# Altium PCB Core.PcbDoc (part 3 of 4)
Units mil, origin at the board's own origin, x right, y up, seen from the top; angles counter-clockwise.
Board outline 3055.22 x 2665.85 mil, 4 copper layers (Top Layer, Layer 1, Layer 2, Bottom Layer), stack 61.583 mil thick; 290 components, 231 nets, 1079 pads, 581 vias.
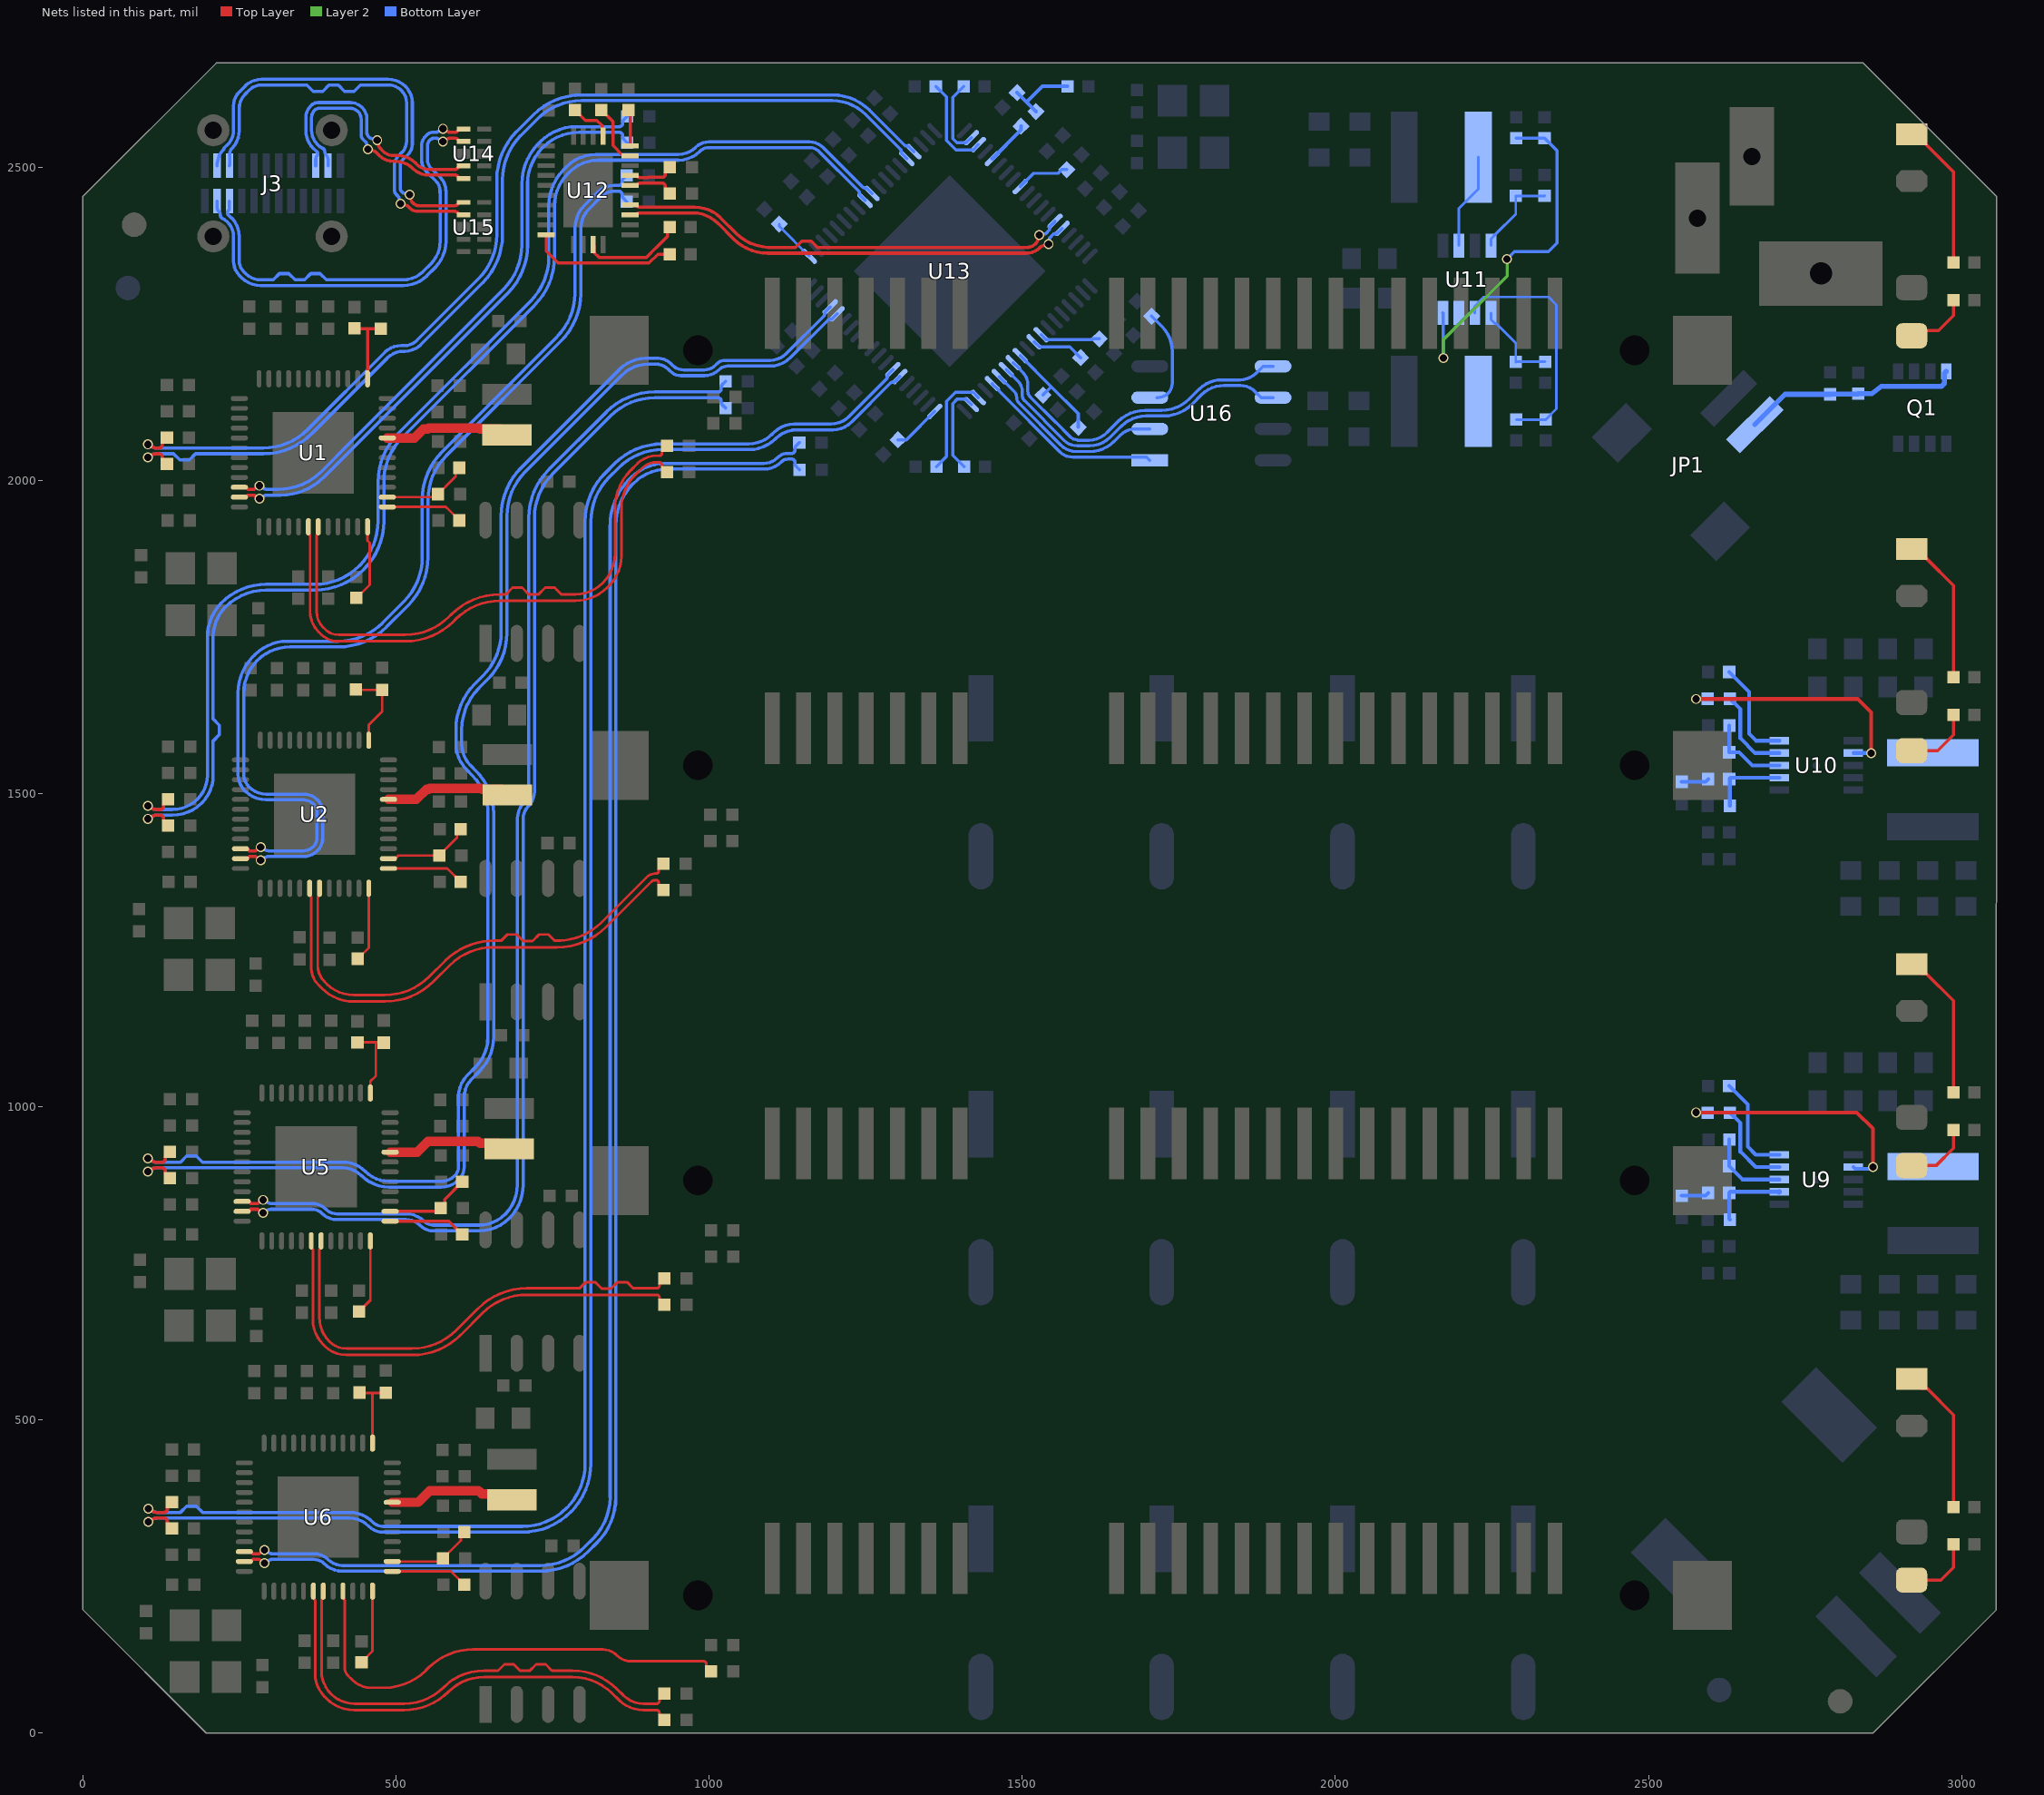
[diagram p5: the nets of this part, all layers, seen from the top]

## Via types
v1: diameter 15.75, hole 11.81, Top Layer to Bottom Layer, tented both sides, 581 vias

## Nets (pads, with @x,y where several pads share a name; then routed paths per layer and width w, separated by ;. In a path a pad name is that pad's centre, name@x,y a point inside that pad or via, vN(x,y) a via of type N, cw(c..) or ccw(c..) an arc to the next point about the centre after c; other vN are vias at no path point) (continued)
IN_SSRX2_N: J3.A10 U15.7 | length 692.7
  Top Layer w5.15: v1(507.33,2441.33) ccw(c511.62,2445.62) 511.62,2439.55 513.21,2439.55 cw(c513.21,2429.65) 520.2,2436.66 522.45,2434.41 ccw(c534.86,2446.82) 534.8,2429.27 ccw(c534.86,2446.82) 534.86,2429.27 593.06,2429.27 cw(c593.06,2421.11) U15.7@598.82,2426.88 ; U15.7@598.83,2426.87 cw(c597.31,2425.36) 599.45,2425.36 600.13,2424.68 ccw(c601.78,2426.33) 601.78,2424 U15.7@608,2424
  Bottom Layer w5.15: J3.A10@234.1,2502.34 ccw(c232.6,2503.85) 234.72,2503.85 234.72,2522.09 cw(c245.19,2522.09) 237.79,2529.49 237.85,2529.55 ccw(c208.93,2558.47) 248.03,2546.49 ccw(c208.93,2558.47) 249.83,2558.47 249.83,2594 cw(c280.93,2594) 258.94,2616 265.97,2623.03 cw(c285.21,2603.79) 285.21,2631 343,2631 358,2631 368,2621 383,2621 393,2631 408,2631 418,2621 433,2621 443,2631 487.27,2631 cw(c487.27,2600.27) 499.36,2628.52 cw(c487.27,2600.27) 509,2622 cw(c489.69,2602.69) 517,2602.69 517,2540.8 cw(c493.2,2540.8) 510.03,2523.97 504.18,2518.12 ccw(c520.23,2502.07) 497.53,2502.07 497.53,2463.09 ccw(c506.62,2463.09) 500.16,2456.7 ; 500.19,2456.67 502.93,2453.93 cw(c496.6,2447.6) 505.55,2447.6 505.55,2445.62 ccw(c511.62,2445.62) v1(507.33,2441.33)
IN_SSRX2_P: J3.A11 U15.6 | length 694.5
  Top Layer w5.15: v1(522,2456) cw(c517.7,2451.7) 523.78,2451.7 523.78,2450.12 ccw(c533.68,2450.12) 526.67,2443.13 ; 526.68,2443.12 527.58,2442.22 ccw(c536.76,2451.39) 536.71,2438.42 ccw(c536.76,2451.39) 536.76,2438.42 593.06,2438.42 ccw(c593.06,2446.57) 598.81,2440.79 ccw(c597.31,2442.32) 599.45,2442.32 600.13,2443 cw(c601.78,2441.36) 601.78,2443.69 U15.6@608,2443.69
  Bottom Layer w5.15: J3.A11@214.42,2502.34 214.42,2505.71 217.75,2519.45 223.05,2526.12 cw(c228.19,2522.03) 223.75,2526.87 ccw(c220.23,2530.63) 223.86,2526.98 224.6,2527.71 ccw(c220.96,2531.37) 225.03,2528.21 cw(c228.58,2528.21) 226.07,2530.72 231.32,2535.97 ccw(c208.73,2558.55) 239.64,2550.48 ccw(c208.73,2558.55) 240.68,2558.55 240.68,2597.79 cw(c271.78,2597.79) 249.79,2619.79 259.56,2629.56 cw(c285.13,2604) 259.61,2629.61 cw(c285.13,2604) 285.13,2640.15 487.32,2640.15 cw(c487.32,2600.39) 515.44,2628.5 515.51,2628.43 cw(c489.82,2602.74) 526.15,2602.74 526.15,2537.01 cw(c502.35,2537.01) 519.18,2520.18 510.7,2511.7 ccw(c520.39,2502) 506.68,2502 506.68,2466.96 ccw(c515.97,2466.96) 509.4,2460.4 ccw(c515.72,2466.72) 515.72,2457.78 517.7,2457.78 cw(c517.7,2451.7) v1(522,2456)
IN_SSTX1_N: J3.A3 U14.9 | length 414.5
  Top Layer w5.15: v1(470,2543) cw(c465.7,2538.7) 471.78,2538.7 471.78,2537.12 ccw(c481.68,2537.12) 474.67,2530.13 ; 474.68,2530.12 479.65,2525.15 ccw(c496,2541.51) 496,2518.38 502.79,2518.38 cw(c502.79,2478.26) 531.15,2506.64 533.84,2503.95 ccw(c552.02,2522.13) 552.02,2496.42 594.3,2496.42 ccw(c594.3,2501.57) 597.94,2497.93 599.45,2499.43 cw(c601.6,2499.43) 600.08,2500.95 cw(c601.85,2499.18) 601.85,2501.69 U14.9@608,2501.69
  Bottom Layer w5.15: 357.62,2547.73 cw(c397.18,2558.52) 357.59,2547.82 cw(c397.18,2558.52) 356.17,2558.52 356.17,2579.15 cw(c381.72,2579.15) 363.66,2597.21 365.07,2598.63 cw(c375.62,2588.09) 375.62,2603 426.78,2603 cw(c426.78,2575.92) 445.93,2595.07 446.07,2594.93 cw(c427.91,2576.78) 453.59,2576.78 453.59,2555.19 ccw(c463.19,2555.19) 456.39,2548.41 457.12,2547.68 ; 357.63,2547.68 ccw(c397.18,2558.52) 368.19,2529.52 ccw(c397.49,2558.64) 368.34,2529.37 ccw(c397.49,2558.64) 372.92,2525.43 cw(c369.88,2521.27) 375.03,2521.27 375.03,2519.45 374.53,2518.76 ccw(c380.89,2512.4) 371.9,2512.4 J3.A3@371.9,2502.34 ; 457.13,2547.67 ccw(c464.12,2554.68) 464.12,2544.78 465.7,2544.78 cw(c465.7,2538.7) v1(470,2543)
IN_SSTX1_P: J3.A2 U14.10 | length 402.5
  Top Layer w5.15: v1(455.33,2528.33) ccw(c459.62,2532.62) 459.62,2526.55 461.21,2526.55 cw(c461.21,2516.65) 468.2,2523.66 473.22,2518.64 ; 473.25,2518.61 ccw(c495.94,2541.36) 495.94,2509.23 499,2509.23 cw(c499,2469.11) 527.37,2497.48 527.41,2497.44 ccw(c551.97,2522.01) 551.97,2487.27 594.3,2487.27 cw(c594.3,2482.12) 597.94,2485.76 599.45,2484.25 ccw(c601.6,2484.25) 600.08,2482.73 ccw(c601.85,2484.5) 601.85,2482 U14.10@608,2482
  Bottom Layer w5.15: 366.4,2550.35 ccw(c397.34,2558.58) 366.47,2550.1 ccw(c397.34,2558.58) 374.69,2535.95 ccw(c397.49,2558.64) 374.79,2535.86 ccw(c397.49,2558.64) 382.39,2530.24 383.56,2529.62 cw(c381.17,2525.07) 386.31,2525.14 ; 366.39,2550.38 cw(c397.34,2558.58) 365.32,2558.58 365.32,2579.07 cw(c381.91,2579.07) 370.17,2590.79 ; 370.18,2590.8 cw(c377.55,2583.44) 377.55,2593.85 426.69,2593.85 cw(c426.69,2575.69) 439.53,2588.53 cw(c427.68,2576.68) 444.44,2576.68 444.44,2551.18 ccw(c453.52,2551.18) 447.07,2544.79 ; 386.31,2525.11 ccw(c395.3,2525.11) 388.94,2518.77 cw(c382.59,2512.4) 391.58,2512.4 J3.A2@391.58,2502.34 ; 447.1,2544.76 450.65,2541.21 cw(c443.65,2534.21) 453.55,2534.21 453.55,2532.62 ccw(c459.62,2532.62) v1(455.33,2528.33)
IN_SSTX2_N: J3.B2 U14.7 | length 737.3
  Top Layer w5.15: v1(575,2540.52) ccw(c575,2546.6) 576.22,2540.65 ccw(c575,2546.6) 579.3,2542.3 v1@580.42,2543.42 ; v1@580.42,2543.43 cw(c587.42,2536.42) 587.42,2546.32 593.06,2546.32 cw(c593.06,2538.17) U14.7@598.82,2543.93 ; U14.7@598.83,2543.93 cw(c597.31,2542.42) 599.45,2542.42 600.13,2541.74 ccw(c601.78,2543.38) 601.78,2541.06 U14.7@608,2541.06
  Bottom Layer w5.15: J3.B2@214.42,2445.66 214.42,2435.6 ccw(c223.41,2435.6) 217.05,2429.24 cw(c210.7,2422.89) 219.69,2422.89 ; 219.69,2422.86 ccw(c224.83,2422.91) 222.54,2418.3 cw(c208.51,2389.36) 240.68,2389.36 240.68,2365.83 240.68,2362 240.68,2349.92 ccw(c273.35,2349.92) 250.22,2326.84 ; 250.24,2326.82 253.58,2323.48 ccw(c284.08,2353.98) 253.65,2323.41 ccw(c284.08,2353.98) 283.98,2310.85 ccw(c284.08,2353.98) 284.08,2310.85 511.72,2310.85 ccw(c511.72,2364.14) 549.4,2326.46 562.3,2339.36 ccw(c519.95,2381.71) 579.84,2381.71 579.84,2462.62 579.53,2462.93 ccw(c551.16,2462.93) 571.22,2482.99 556.26,2497.95 cw(c571.01,2512.69) 550.15,2512.69 550.15,2533.71 cw(c563.29,2533.71) 553.99,2542.99 cw(c562,2535.02) 562,2546.32 562.58,2546.32 cw(c562.58,2536.42) v1@569.58,2543.43 ; v1@569.58,2543.42 570.7,2542.3 ccw(c575,2546.6) v1(575,2540.52)
IN_SSTX2_P: J3.B3 U14.6 | length 737.1
  Top Layer w5.15: v1(575,2561.27) cw(c575,2555.2) 579.3,2559.49 580.42,2558.37 ccw(c587.42,2565.37) 587.42,2555.47 593.06,2555.47 ccw(c593.06,2563.63) 598.81,2557.85 ccw(c597.31,2559.38) 599.45,2559.38 600.13,2560.06 cw(c601.78,2558.42) 601.78,2560.74 U14.6@608,2560.74
  Bottom Layer w5.15: J3.B3@234.1,2445.66 234.1,2435.6 cw(c225.11,2435.6) 231.47,2429.24 230.97,2428.55 230.97,2426.73 ccw(c236.12,2426.73) 233.03,2422.61 cw(c208.51,2389.36) 249.83,2389.36 249.83,2365.83 ; 249.83,2365.79 249.83,2350 ccw(c273.55,2350) 256.76,2333.24 260,2330 ccw(c284.14,2354.14) 260.48,2329.53 ccw(c284.14,2354.14) 284.14,2320 289,2320 304,2320 314,2330 329,2330 339,2320 354,2320 364,2330 379,2330 389,2320 421,2320 511.62,2320 ccw(c511.62,2364.38) 543,2333 555.78,2345.78 ccw(c519.78,2381.77) 570.69,2381.77 570.69,2458.83 570.38,2459.14 570.38,2462.83 ccw(c550.91,2462.83) 564.69,2476.58 549.1,2492.17 cw(c568.64,2511.72) 541,2511.72 541,2533.74 cw(c563.21,2533.74) 541,2533.81 cw(c563.21,2533.74) 547.47,2549.41 ; 547.5,2549.45 548.88,2550.82 cw(c560.11,2539.6) 560.11,2555.47 562.58,2555.47 ccw(c562.58,2565.37) 569.58,2558.37 570.7,2559.49 cw(c575,2555.2) v1(575,2561.27)
LXO-A: L1.1 U1.44 | length 198.3
  Top Layer w15: U1.44@486.11,2067.62 529.62,2067.62 543.75,2081.75 550.8,2081.75 552.39,2083.34 632.66,2083.34 634.25,2081.75 666.25,2081.75 L1.1@674,2074
LXO-B: L2.1 U2.44 | length 201.3
  Top Layer w15: U2.44@488.11,1490.62 532.62,1490.62 548.75,1506.75 552.09,1506.75 553.68,1508.34 636.66,1508.34 638.25,1506.75 669.82,1506.75 L2.1@678,1498.58
LXO-C: L3.1 U5.44 | length 191.7
  Top Layer w15: U5.44@490.65,927.62 533.62,927.62 551,945 630.81,945 634.06,941.75 664.25,941.75 L3.1@671,935
LXO-D: L4.1 U6.44 | length 212.2
  Top Layer w15: U6.44@494.11,368.62 535.62,368.62 554,387 631.98,387 637.23,381.75 674.25,381.75 L4.1@690,366
NetC17_2: C17.2 R1.2 U1.38 | length 139.1
  Top Layer w4: U1.38@486.11,1973.13 562.13,1973.13 595.5,2006.5 595.5,2014.18 R1.2@601.32,2020
NetC18_2: C18.2 R2.2 U2.38 | length 139.1
  Top Layer w4: U2.38@488.11,1396.13 499,1396.13 503.87,1401 C18.2@569,1401 597.5,1429.5 597.5,1437.18 R2.2@603.32,1443
NetC23_1: C23.1 R5.2 U1.1 | length 122.6
  Top Layer w5.15: R5.2@434,2242.86 434.86,2242 455.43,2242 ; U1.1@454.61,2162.11 454.61,2241.18 455.43,2242 ; C23.1@476,2242 455.43,2242
NetC24_1: C24.1 R6.2 U2.1 | length 131.3
  Top Layer w4: R6.2@436,1665.86 436.58,1665.28 C24.1@478,1665.28 478,1631 456.63,1609.63 U2.1@456.61,1585.11
NetC59_2: C59.2 R9.2 U5.38 | length 139.1
  Top Layer w5: U5.38@490.65,833.13 566.68,833.13 577.85,844.31 577.85,851.99 R9.2@605.86,880
NetC60_2: C60.2 R10.2 U6.38 | length 139.1
  Top Layer w4: U6.38@494.11,274.13 570.13,274.13 603.5,307.5 603.5,315.18 R10.2@609.32,321
NetC65_1: C65.1 R13.2 U5.1 | length 126.7
  Top Layer w4: R13.2@438.54,1102.86 468,1102.86 ; U5.1@459.16,1022.11 459.16,1040.52 468,1049.37 468,1102.86 ; C65.1@480.54,1102.28 479.97,1102.86 468,1102.86
NetC66_1: C66.1 R14.2 U6.1 | length 122.7
  Top Layer w4: R14.2@442,543.86 442.58,543.28 463.29,543.28 ; U6.1@462.61,463.11 462.61,542.61 463.29,543.28 ; C66.1@484,543.28 463.29,543.28
NetC101_1: C101.1 L5.1 U9.2 | length 406.9
  Top Layer w6: v1(2576,991) 2832.51,991 2858.4,965.11 v1(2858.4,903.77)
  Bottom Layer w6: v1(2576,991) 2594.11,991 C101.1@2594.47,990.64 ; U9.2@2827.05,903.68 2829.96,900.78 2830.05,900.87 2852.86,900.87 2855.76,903.77 v1(2858.4,903.77)
NetC101_2: C101.2 U9.9 | length 141.9
  Bottom Layer w6: C101.2@2629.9,990.64 2646.62,973.92 2646.62,928.18 2671.12,903.68 U9.9@2708.95,903.68
NetC110_2: C110.2 R19.1 U9.7 | length 124.8
  Bottom Layer w6: C110.2@2629.9,819.78 2628.79,820.89 R19.1@2628.79,862.5 2630.61,864.32 2707.13,864.32 U9.7@2708.04,863.41
  Bottom Layer w8: U9.7@2708.04,863.41 U9.7@2708.95,864.32
NetC111_2: C111.2 R19.2 | length 44.1
  Bottom Layer w6: C111.2@2553.06,858.07 2590.9,858.07 R19.2@2595.33,862.5
NetC112_1: C112.1 L6.1 U10.2 | length 400.1
  Top Layer w6: v1(2576,1651) 2834,1651 2855.4,1629.6 v1(2855.4,1564.62)
  Bottom Layer w6: v1(2576,1651) 2594.12,1651 C112.1@2594.41,1651.29 ; U10.2@2827.08,1564.65 v1@2855.37,1564.65
NetC112_2: C112.2 U10.9 | length 142.1
  Bottom Layer w6: C112.2@2629.84,1651.29 2646.63,1634.5 2646.63,1588.18 2670.12,1564.68 U10.9@2708.95,1564.68
NetC121_2: C121.2 R25.1 U10.7 | length 123.4
  Bottom Layer w6: C121.2@2629.84,1480.43 2629.84,1524.25 2630.9,1525.32 U10.7@2708.95,1525.32
NetC122_2: C122.2 R25.2 | length 44.1
  Bottom Layer w6: C122.2@2553,1518.72 2590.84,1518.72 R25.2@2595.27,1523.14
NetC130_2: C130.2 JP1.1 Q1.1 R18.2 | length 349.6
  Bottom Layer w8: JP1.1@2669.63,2088.87 2718.04,2137.28 C130.2@2790,2137.28 2790.49,2137.78 2834.51,2137.78 R18.2@2835,2138.27 2840.84,2138.27 2856.84,2138.27 2871.72,2150 2967.66,2150 2972.34,2154.69 2972.34,2170.83 Q1.1@2975.39,2173.87
NetC131_1: C131.1 R40.1 U13.68 | length 171.9
  Bottom Layer w5.15: U13.68@1496.78,2199.01 1546.4,2149.4 ; R40.1@1533,2136 1546.4,2149.4 ; C131.1@1589.47,2084.47 1589.47,2106.32 1546.4,2149.4
NetL7_2: L7.2 U11.6 | length 154
  Bottom Layer w4.29: U11.6@2197.2,2374.75 2197.2,2434.02 2228,2464.82 L7.2@2228,2516
NetL8_2: L8.2 U11.3
NetLED1_1: LED1.1 R56.2 | length 236.7
  Top Layer w5.15: LED1.1@2920,2552.4 2927.5,2552.4 2942.42,2537.48 2942.42,2536.62 2986.77,2492.27 R56.2@2986.77,2347.8
NetLED2_1: LED2.1 R57.2 | length 94.4
  Top Layer w5.15: LED2.1@2929.02,2234.69 2933.39,2239.07 2963.07,2239.07 2986.77,2262.77 R57.2@2986.77,2287.82
NetLED3_1: LED3.1 R58.2 | length 237.5
  Top Layer w5.15: LED3.1@2920,1890.07 2934.92,1875.15 2943.85,1875.15 2986.77,1832.23 R58.2@2986.77,1685.5
NetLED4_1: LED4.1 R59.2 | length 109.1
  Top Layer w5.15: LED4.1@2920,1568.39 2961.39,1568.39 2986.77,1593.77 R59.2@2986.77,1625.62
NetLED5_1: LED5.1 R60.2 | length 237.2
  Top Layer w5.15: LED5.1@2920,1227.75 2934.92,1212.83 2943.17,1212.83 2986.77,1169.23 R60.2@2986.77,1023
NetLED6_1: LED6.1 R61.2 | length 107.6
  Top Layer w5.15: LED6.1@2920,906.06 2959.06,906.06 2986.77,933.77 R61.2@2986.77,963.12
NetLED7_1: LED7.1 R62.2 | length 237.7
  Top Layer w5.15: LED7.1@2920,565.43 2934.92,550.5 2944.5,550.5 2986.77,508.23 R62.2@2986.77,361
NetLED8_1: LED8.1 R63.2 | length 112
  Top Layer w5.15: LED8.1@2920,244.53 2966.53,244.53 2986.77,264.77 R63.2@2986.77,301.62
NetR3_2: R3.2 U1.37 | length 124
  Top Layer w4: U1.37@486.23,1957.5 579.82,1957.5 581.02,1956.3 R3.2@601.32,1936
NetR4_2: R4.2 U2.37 | length 124.1
  Top Layer w4: U2.37@488.11,1380.39 581.94,1380.39 R4.2@603.32,1359
NetR7_2: R7.2 U1.36 | length 123.7
  Top Layer w4: R7.2@437,1812.27 458,1833.27 458,1900.23 454.61,1903.61 U1.36@454.61,1925.89
NetR8_2: R8.2 U2.36 | length 119.9
  Top Layer w4: R8.2@439,1236.27 456.61,1253.88 U2.36@456.61,1348.89
NetR11_2: R11.2 U5.37 | length 124.1
  Top Layer w5: U5.37@490.65,817.39 584.48,817.39 R11.2@605.86,796
NetR12_2: R12.2 U6.37 | length 124.1
  Top Layer w4: U6.37@494.11,258.39 587.94,258.39 R12.2@609.32,237
NetR15_2: R15.2 U5.36 | length 120.1
  Top Layer w4.29: R15.2@441.09,673.27 459.16,691.34 U5.36@459.16,785.89
NetR16_2: R16.2 U6.36 | length 120.9
  Top Layer w4: R16.2@445,113.27 462.61,130.88 U6.36@462.61,226.89
NetR17_2: R17.2 R21.1 U9.8 | length 131.8
  Bottom Layer w6: R17.2@2629.05,947.93 2629.05,905.46 R21.1@2628.79,905.21 2650.01,884 U9.8@2708.95,884
NetR22_1: R22.1 U9.10 | length 165.3
  Bottom Layer w6: R22.1@2628.79,1033.35 2658.31,1003.84 2658.31,936.24 2671.19,923.37 U9.10@2708.95,923.37
NetR24_2: R24.2 R27.1 U10.8 | length 131.7
  Bottom Layer w6: R24.2@2628.99,1608.57 2628.99,1566.11 R27.1@2628.73,1565.86 2644.8,1565.86 2665.66,1544.99 U10.8@2708.95,1544.99
NetR28_1: R28.1 U10.10 | length 164.6
  Bottom Layer w6: R28.1@2628.73,1694 2660.61,1662.12 2660.61,1595.53 2671.78,1584.37 U10.10@2708.95,1584.37
NetR30_2: R30.2 R32.1 U11.4 | length 584
  Layer 2 w5: v1(2172.43,2195) 2172.43,2224.43 2274,2326 v1(2274,2353)
  Bottom Layer w5: U11.4@2171.61,2267.25 2172.43,2266.43 v1(2172.43,2195) ; v1(2274,2353) 2286,2365 2340,2365 2354,2379 2354,2526.27 R30.2@2334,2546.27 R32.1@2289,2546.27
NetR31_2: R31.2 R33.1 U11.2 | length 389.4
  Bottom Layer w4.29: U11.2@2222.8,2267.25 2222.8,2278 2233.74,2288.95 2233.74,2289.05 2237.34,2292.64 2340.36,2292.64 2353,2280 2353,2114 R31.2@2336,2097 R33.1@2289,2097
NetR34_2: R34.2 R36.1 U11.8 | length 141.8
  Bottom Layer w4.29: U11.8@2248.39,2374.75 2248.39,2385.5 2254.74,2391.86 2254.86,2391.86 2288,2425 R34.2@2288,2454 2333.73,2454 R36.1@2334,2454.27
NetR35_2: R35.2 R37.1 U11.1 | length 143
  Bottom Layer w4.29: U11.1@2248.39,2267.25 2248.39,2256.5 2254.74,2250.14 2256.86,2250.14 2288,2219 R35.2@2288,2189 2288.25,2189.25 R37.1@2335,2189.25
NetR38_2: R38.2 U12.24 | length 58.3
  Top Layer w5: R38.2@871,2591 873.93,2588.07 U12.24@873.93,2533.87
NetR39_2: R39.2 U12.23 | length 98.4
  Top Layer w5: R39.2@828,2591 846.4,2572.6 846.4,2534.49 861.33,2519.56 872.49,2519.56 U12.23@873.93,2518.12
NetR41_1: R41.1 U13.66 | length 84.7
  Bottom Layer w5.15: U13.66@1518.99,2221.22 1527.35,2212.85 1576.15,2212.85 R41.1@1593.17,2195.83
NetR42_1: R42.1 U13.65 | length 96.7
  Bottom Layer w5.15: U13.65@1530.16,2232.39 1537.99,2224.56 1611.28,2224.56 1612.72,2226 R42.1@1623,2226
NetR43_1: R43.1 U13.75 | length 144.2
  Bottom Layer w5: R43.1@1407,2022 1388.9,2040.1 1388.9,2122.59 1395.68,2129.37 1410.44,2129.37 U13.75@1418.79,2121.02
NetR44_1: R44.1 U13.74 | length 171.1
  Bottom Layer w5: R44.1@1363,2022 1379.1,2038.1 1379.1,2126.1 1393.54,2140.54
  Bottom Layer w5.15: 1393.54,2140.54 1421.61,2140.54 U13.74@1429.96,2132.19
NetR45_1: R45.1 U12.25 | length 70.7
  Top Layer w5: R45.1@786,2591.27 802.66,2574.61 820.76,2574.61 829.18,2566.19 829.18,2551.06 U12.25@830.62,2549.62
NetR46_2: R46.2 U12.13 | length 163.6
  Top Layer w5: U12.13@814.88,2376.38 816.32,2374.94 816.32,2363.68 824,2356 900,2356 915,2371
  Top Layer w5.15: 915,2371 933.45,2389.45 933.45,2400.18 R46.2@937.27,2404
NetR47_1: R47.1 U13.1 | length 77.2
  Bottom Layer w5: R47.1@1301.83,2064.83 1315.23,2064.83 U13.1@1360.31,2109.92
NetR48_2: R48.2 U12.10 | length 237
  Top Layer w5: U12.10@740.07,2392.13 740.07,2365.93 759,2347 904.11,2347 918.11,2361 R48.2@937.27,2361
NetR49_1: R49.1 U13.47 | length 85.6
  Bottom Layer w5: U13.47@1496.78,2468.99 1517.8,2490 1556.95,2490 1563.12,2496.17 R49.1@1571.17,2496.17
NetR50_1: R50.1 R51.2 R53.1 | length 118.3
  Bottom Layer w6: R50.1@1491.83,2618.83 1506.83,2603.83 ; R51.2@1521.83,2588.83 1506.83,2603.83 ; R53.1@1572.27,2629 1532,2629 1506.83,2603.83
NetR51_1: R51.1 U13.43 | length 70.7
  Bottom Layer w6: U13.43@1452.24,2513.53 1498.17,2559.47 R51.1@1498.17,2565.17
NetR52_1: R52.1 U13.41 | length 154.1
  Bottom Layer w5: R52.1@1362,2629 1379.1,2611.9 1379.1,2542.48 1394.12,2527.46 1421.61,2527.46 U13.41@1429.96,2535.81
NetR54_1: R54.1 U13.40 | length 126.9
  Bottom Layer w5: R54.1@1406.27,2629 1388.9,2611.63 1388.9,2545.41 1395.68,2538.63 1410.44,2538.63 U13.40@1418.79,2546.98
NetR55_1: R55.1 U13.20 | length 71.2
  Bottom Layer w4: R55.1@1112,2409 1112,2405.61 U13.20@1159.92,2357.69
NetR64_1: R64.1 U16.3 | length 156.1
  Bottom Layer w5: R64.1@1706.61,2262.01 1723.1,2245.51 ; U16.3@1714.79,2132 1716.38,2132 ccw(c1716.38,2155.22) 1732.78,2138.78 ccw(c1716.38,2155.22) 1739.6,2155.22 1739.6,2205.68 ccw(c1683.27,2205.68) 1723.13,2245.49
RX1_N: C5.2 U6.31 | length 760.9
  Top Layer w4.29: U6.31@383.87,226.89 383.87,218.01 cw(c379.22,218.01) 382.51,214.71 ccw(c385.8,211.42) 381.14,211.42 381.14,99.57 ccw(c433.57,99.57) 396.47,62.53 ; 396.53,62.47 ccw(c433.57,99.57) 433.57,47.15 512.77,47.15 ccw(c512.77,137.37) 576.57,73.57 cw(c640.37,9.77) 640.37,100 641.73,100 663.14,100 673.14,110 688.14,110 698.57,99.57 713.57,99.57 724,110 739,110 749,100 764,100 782.02,100 cw(c782.02,-0.27) 852.92,70.63 863.18,60.37 ccw(c895.11,92.3) 895.11,47.14 916.3,47.15 ccw(c916.3,51.44) 919.33,48.4 ccw(c916.3,51.44) 920.59,51.44 cw(c929.92,51.44) 923.32,58.03 C5.2@928.28,63
RX1_P: C7.2 U6.30 | length 760.6
  Top Layer w4.29: U6.30@368.13,226.89 368.13,218.01 ccw(c372.78,218.01) 369.48,214.72 cw(c366.2,211.42) 370.86,211.42 370.86,95.31 ccw(c423.28,95.31) 386.18,58.27 389.27,55.17 ccw(c433.5,99.4) 389.37,55.08 ccw(c433.5,99.4) 433.39,36.86 ccw(c433.5,99.4) 433.5,36.85 512.91,36.85 ccw(c512.91,137.03) 583.75,66.2 cw(c640.52,9.43) 640.52,89.71 781.92,89.71 cw(c781.92,-0.52) 845.68,63.32 855.93,53.07 ccw(c895.07,92.2) 856.02,52.98 ccw(c895.07,92.2) 894.97,36.86 ccw(c895.07,92.2) 895.07,36.85 916.3,36.85 cw(c916.3,32.56) 919.33,35.6 cw(c916.3,32.56) 920.59,32.56 ccw(c929.92,32.56) 923.32,25.97 C7.2@928.28,21
RX2_N: C6.2 U5.31 | length 760.5
  Top Layer w4.29: U5.31@380.42,785.89 380.42,775.08 377.69,772.35 377.69,664.11 ccw(c432.72,664.11) 393.78,625.22 ; 393.83,625.17 ccw(c420.83,652.22) 420.83,614 525.58,614 ccw(c525.58,714) 596.29,643.29 630.87,677.87 cw(c708.79,599.95) 630.97,677.97 cw(c708.79,599.95) 708.79,710.14 770,710.14 793.14,710.14 803.14,720.14 818.14,720.14 828.57,709.72 843.57,709.72 854,720.14 869,720.14 879,710.14 894,710.14 916.3,710.14 ccw(c916.3,714.44) 919.33,711.4 ccw(c916.3,714.44) 920.59,714.44 920.59,715.48 cw(c927.4,715.48) 922.58,720.29 C6.2@928.28,726
RX2_P: C8.2 U5.30 | length 760.2
  Top Layer w4.29: U5.30@364.67,785.89 364.67,775.08 367.4,772.35 367.4,660 ccw(c422.81,660) 383.63,620.82 386.58,617.87 ccw(c420.76,652.05) 386.66,617.79 ccw(c420.76,652.05) 420.66,603.71 ccw(c420.76,652.05) 420.76,603.71 525.62,603.71 ccw(c525.62,713.89) 603.53,635.98 638.12,670.57 cw(c708.83,599.86) 708.83,699.86 916.3,699.86 cw(c916.3,695.56) 919.33,698.6 cw(c916.3,695.56) 920.59,695.56 920.59,694.52 ccw(c927.4,694.52) 922.58,689.71 C8.2@928.28,684
RX3_N: C13.2 U2.31 | length 792.7
  Top Layer w4.29: U2.31@377.87,1348.89 377.87,1340.01 cw(c373.22,1340.01) 376.51,1336.71 ccw(c379.8,1333.42) 375.14,1333.42 375.14,1277.33 375.14,1225.44 ccw(c411.44,1225.44) 385.78,1199.78 389.28,1196.28 ccw(c432.7,1239.7) 432.7,1178.29 482.32,1178.29 ccw(c482.32,1278.29) 553.03,1207.58 578.17,1232.72 cw(c656.09,1154.8) 578.27,1232.82 cw(c656.09,1154.8) 638.9,1263.65 cw(c656.09,1154.8) 656.09,1265 667.77,1265 677.77,1275 692.77,1275 703.2,1264.57 718.2,1264.57 728.63,1275 743.63,1275 753.63,1265 757.5,1265 ccw(c757.5,1365) 768.61,1265.62 ccw(c757.5,1365) 828.21,1294.29 900.48,1366.57 cw(c913.95,1353.1) 905.43,1370.13 cw(c913.95,1353.1) 913.95,1372.14 915.3,1372.14 ccw(c915.3,1376.44) 918.33,1373.4 ccw(c915.3,1376.44) 919.59,1376.44 919.59,1377.48 cw(c926.4,1377.48) 921.58,1382.29 C13.2@927.28,1388
RX3_P: C15.2 U2.30 | length 792.4
  Top Layer w4.29: U2.30@362.13,1348.89 362.13,1340.01 ccw(c366.78,1340.01) 363.49,1336.71 cw(c360.2,1333.42) 364.86,1333.42 364.86,1281.59 364.85,1221.18 ccw(c401.15,1221.18) 375.49,1195.51 382.05,1188.95 ccw(c432.63,1239.53) 382.09,1188.91 ccw(c432.63,1239.53) 432.63,1168 482.36,1168 ccw(c482.36,1278.18) 560.27,1200.27 585.42,1225.42 cw(c656.13,1154.71) 656.13,1254.71 757.54,1254.71 ccw(c757.54,1364.89) 835.45,1286.98 907.73,1359.26 cw(c914,1352.98) 914,1361.86 915.3,1361.86 cw(c915.3,1357.56) 918.33,1360.6 cw(c915.3,1357.56) 919.59,1357.56 919.59,1356.52 ccw(c926.4,1356.52) 921.58,1351.71 C15.2@927.28,1346
RX4_N: C14.2 U1.31 | length 921.2
  Top Layer w4.29: U1.31@375.87,1925.89 375.87,1917.01 cw(c371.22,1917.01) 374.51,1913.71 ccw(c377.8,1910.42) 373.14,1910.42 373.14,1859.83 373.14,1791.24 373.15,1791.07 ccw(c412.76,1791.24) 373.16,1790.03 ccw(c410.19,1791.2) 383.96,1765.04 386.97,1762.03 ccw(c408.01,1782.98) 397.37,1755.26 ccw(c408.78,1787.32) 408.79,1753.29 514.75,1753.29 ccw(c514.75,1852.25) 535.7,1755.53 ccw(c514.75,1852.25) 584.72,1782.28 588.17,1785.72 cw(c666.09,1707.8) 666.09,1818 675.64,1818 686.26,1828.63 701.26,1828.63 712.32,1817.57 727.32,1817.57 738.37,1828.63 753.37,1828.63 764,1818 779,1818 786.54,1818 ccw(c786.54,1879.47) 829.98,1835.98 ccw(c782.56,1883.44) 849.65,1883.44 849.65,1954.9 cw(c935.93,1954.9) 874.92,2015.9 885.59,2026.57 cw(c915.95,1996.22) 885.65,2026.63 cw(c915.95,1996.22) 915.95,2039.14 920.58,2039.14 ccw(c920.58,2043.44) 923.61,2040.4 ccw(c920.58,2043.44) 924.87,2043.44 924.87,2044.48 cw(c931.68,2044.48) 926.86,2049.29 C14.2@932.57,2055
RX4_P: C16.2 U1.30 | length 919.9
  Top Layer w4.29: U1.30@360.13,1925.89 360.13,1917.01 ccw(c364.78,1917.01) 361.49,1913.71 cw(c358.2,1910.42) 362.86,1910.42 362.86,1864.09 362.85,1791.2 ccw(c410.19,1791.2) 376.67,1757.78 ccw(c410.19,1791.2) 376.72,1757.73 379.74,1754.71 ccw(c408.01,1782.98) 408.01,1743 514.8,1743 ccw(c514.8,1852.12) 591.96,1774.96 595.42,1778.42 cw(c666.13,1707.71) 666.13,1807.71 786.58,1807.71 ccw(c786.58,1879.37) 837.25,1828.7 840.29,1831.74 ccw(c792.85,1879.18) 859.94,1879.18 859.94,1954.77 cw(c936.23,1954.77) 882.29,2008.71 892.83,2019.26 cw(c916,1996.09) 916,2028.85 920.58,2028.86 cw(c920.58,2024.56) 923.61,2027.6 cw(c920.58,2024.56) 924.87,2024.56 924.87,2023.52 ccw(c931.68,2023.52) 926.86,2018.71 C16.2@932.57,2013
SPICLK: U13.70 U16.6 | length 522.6
  Bottom Layer w5: U13.70@1474.51,2176.74 1493.6,2157.64 cw(c1478.16,2142.2) 1500,2142.2 1500,2136.42 ccw(c1513.96,2136.42) 1504.09,2126.55 1566.82,2063.82 ccw(c1587.99,2084.99) 1587.99,2055.05 1607.42,2055.05 ccw(c1607.42,2101.97) 1640.6,2068.8 1657.75,2085.94 cw(c1698,2045.69) 1698,2102.62 1725.17,2102.62 ccw(c1725.17,2168.22) 1771.55,2121.82 ; 1771.56,2121.83 1786.35,2136.62 cw(c1822.06,2100.91) 1822.06,2151.41 1848.29,2151.41 cw(c1848.29,2118.27) 1871.7,2141.73 ; 1871.72,2141.71 1881.42,2132 U16.6@1900.43,2132
SPICS: U13.72 U16.1 | length 301.6
  Bottom Layer w5: U13.72@1452.24,2154.47 1452.24,2153.69 1462.02,2143.9 1462.02,2143.16 1559.09,2046.09 ccw(c1580.92,2067.92) 1580.92,2037.05 1698.52,2037.05 U16.1@1703.57,2032
SPISI: U13.69 U16.5 | length 517.5
  Bottom Layer w5: U13.69@1485.61,2187.84 1493.96,2179.49 1500.11,2173.34 cw(c1478.65,2151.88) 1509,2151.94 cw(c1478.65,2151.88) 1509,2151.88 1509,2141.95 ccw(c1521.22,2141.95) 1511.66,2134.35 ccw(c1521.22,2141.95) 1512.58,2133.31 1553.97,2091.92 1554.08,2091.92 1576,2070 ccw(c1590.36,2084.36) 1576.04,2069.96 ccw(c1590.36,2084.36) 1587.76,2064.22 1588.64,2064.11 ccw(c1589.47,2070.55) 1589.47,2064.05 1606.3,2064.05 ccw(c1606.3,2104.68) 1635.03,2075.95 1652.86,2093.78 cw(c1695.91,2050.73) 1695.91,2111.62 1722.26,2111.62 ccw(c1722.26,2175.24) 1767.22,2130.22 ; 1767.25,2130.25 1782.33,2145.33 cw(c1818.74,2108.92) 1818.74,2160.41 1847.5,2160.41 ccw(c1847.5,2197.26) 1873.53,2171.18 1884.35,2182 U16.5@1900.43,2182
SPISO: U13.71 U16.2 | length 304.7
  Bottom Layer w5: U13.71@1463.34,2165.57 1487.11,2141.79 cw(c1477.73,2132.41) 1491,2132.41 ccw(c1504.27,2132.41) 1494.88,2123.04 1561.96,2055.96 ; 1561.98,2055.94 ccw(c1585.87,2079.87) 1585.87,2046.05 1608.23,2046.05 ccw(c1608.23,2100.03) 1646.38,2061.85 1656.47,2071.93 ; 1656.48,2071.95 cw(c1680.77,2047.62) 1680.77,2082 U16.2@1703.57,2082
SSRX1_N: C94.1 U13.7 | length 2929.4
  Top Layer w5.15: v1@103.7,358.37 v1(104.8,358.37) cw(c104.8,352.3) 109.1,356.59 v1@110.22,355.47 ; v1@110.23,355.47 ccw(c117.22,362.47) 117.22,352.57 129.87,352.57 ccw(c129.87,357.73) 133.5,354.07 ; 133.51,354.08 ccw(c129.87,357.73) 135.02,357.73 135.02,358.66 cw(c142.43,358.66) 137.18,363.89 C94.1@142.28,369
  Bottom Layer w5.15: v1(104.8,358.37) cw(c104.8,352.3) 109.1,356.59 ccw(c118.8,366.3) 118.8,352.58 141,352.57 156,352.57 166,362.57 181,362.57 191,352.57 252.51,352.57 425.29,352.57 cw(c425.29,299.29) 462.94,337 ; 462.97,336.97 ccw(c479.43,353.43) 479.43,330.15 701.73,330.15 ccw(c701.73,430.15) 772.44,359.44 772.71,359.71 ccw(c702,430.42) 802,430.42 802,1934.27 cw(c911.07,1934.27) 802,1934.42 cw(c911.07,1934.27) 833.85,2011.29 cw(c911.07,1934.27) 833.94,2011.39 848.96,2026.4 cw(c925.6,1949.76) 925.6,2058.15 1063.44,2058.15 ccw(c1063.44,2110.56) 1100.5,2073.5 1103.18,2076.18 cw(c1136,2043.36) 1136,2089.77 1194.64,2089.77 ccw(c1194.64,2129.81) 1222.95,2101.5 1282.96,2161.5 ccw(c1278.94,2165.52) 1284.62,2165.48 cw(c1290.29,2165.52) U13.7@1286.27,2169.52 ; U13.7@1286.28,2169.53 U13.7@1293.49,2176.74
SSRX1_P: C96.1 U13.6 | length 2932.4
  Top Layer w5.15: v1@104.8,342.93 v1(104.8,337.63) ccw(c104.8,343.7) 109.1,339.41 v1@110.22,340.53 ; v1@110.23,340.53 cw(c117.22,333.53) 117.22,343.43 129.87,343.43 cw(c129.87,338.27) 133.5,341.93 ; 133.51,341.92 cw(c129.87,338.27) 135.02,338.27 135.02,337.34 ccw(c142.43,337.34) 137.18,332.11 C96.1@142.28,327
  Bottom Layer w5.15: v1(104.8,337.63) ccw(c104.8,343.7) 109.1,339.41 cw(c118.8,329.7) 118.8,343.42 425.24,343.43 cw(c425.24,299.17) 456.53,330.46 ccw(c479.38,353.31) 479.38,321 701.77,321 ccw(c701.77,430.05) 778.88,352.94 779.26,353.32 ccw(c702.08,430.39) 811.15,430.39 811.15,1934.23 cw(c911.15,1934.23) 840.44,2004.94 855.21,2019.71 cw(c925.92,1949) 925.92,2049 1063.55,2049 ccw(c1063.55,2110.29) 1106.89,2066.95 1106.97,2067.03 ; 1106.99,2067.05 cw(c1139.79,2034.21) 1139.79,2080.62 1197.79,2080.62 ccw(c1197.79,2122.21) 1227.2,2092.8 1289.42,2155.03 ; 1289.43,2155.03 cw(c1293.44,2151.02) 1293.44,2156.69 ccw(c1293.44,2162.37) 1297.43,2158.34 U13.6@1304.66,2165.57
SSRX2_N: C93.1 U13.16 | length 2356.6
  Top Layer w5.15: v1(104,917.37) cw(c104,911.3) 108.3,915.59 109.42,914.47 ccw(c116.42,921.47) 116.42,911.58 126.41,911.58 ccw(c126.41,916.73) 130.04,913.07 ; 130.05,913.08 ccw(c126.41,916.73) 131.56,916.73 131.56,917.66 cw(c138.97,917.66) C93.1@133.72,922.89 ; C93.1@133.73,922.9 C93.1@138.83,928
  Bottom Layer w5.15: v1(104,917.37) cw(c104,911.3) 108.3,915.59 109.42,914.47 ccw(c116.42,921.47) 116.42,911.58 141,911.58 156,911.58 166,921.58 181,921.58 191,911.58 221,911.58 415.1,911.58 ; 415.1,911.57 cw(c415.1,860.23) 451.4,896.53 451.47,896.47 ccw(c488.82,933.82) 488.82,881 572.27,881 ccw(c572.27,911.73) 593.98,889.98 ccw(c579.88,904.12) 599.85,904.12 599.85,1015.92 cw(c648.54,1015.92) 599.85,1016.01 cw(c648.54,1015.92) 614.06,1050.3 cw(c648.54,1015.92) 614.11,1050.35 626.92,1063.15 ccw(c578.31,1111.69) 647,1111.69 647,1467.94 ccw(c559.94,1467.94) 621.54,1529.46 ccw(c559.94,1467.94) 621.5,1529.5 612.64,1538.36 cw(c653.18,1578.9) 595.85,1578.9 595.85,1602.25 cw(c698.55,1602.25) 625.93,1674.87 638.72,1687.66 ccw(c568.01,1758.37) 668.01,1758.37 668.01,1942.95 cw(c777.07,1942.95) 668.01,1943.1 cw(c777.07,1942.95) 699.85,2019.98 cw(c777.07,1942.95) 699.95,2020.07 857.12,2177.24 cw(c898.97,2135.39) 898.97,2194.58 919,2194.58 cw(c919,2167) 938.49,2186.51 941.32,2183.68 ; 941.34,2183.66 ccw(c959.5,2201.86) 959.5,2176.15 992.37,2176.15 ccw(c992.37,2200.63) 1009.68,2183.32 1012.36,2186 ; 1012.38,2186.02 cw(c1025.44,2172.92) 1025.44,2191.42 1096.91,2191.42 ccw(c1096.91,2229.01) 1123.49,2202.43 1182.76,2261.7 ccw(c1178.74,2265.71) 1184.42,2265.71 cw(c1190.1,2265.71) U13.16@1186.07,2269.72 ; U13.16@1186.08,2269.73 U13.16@1193.29,2276.94
SSRX2_P: C95.1 U13.15 | length 2354.9
  Top Layer w5.15: v1(104,896.63) ccw(c104,902.7) 108.3,898.41 109.42,899.53 cw(c116.42,892.53) 116.42,902.42 126.41,902.42 cw(c126.41,897.27) 130.04,900.93 ; 130.05,900.92 cw(c126.41,897.27) 131.56,897.27 131.56,896.34 ccw(c138.97,896.34) C95.1@133.72,891.11 ; C95.1@133.73,891.1 C95.1@138.83,886
  Bottom Layer w5.15: v1(104,896.63) ccw(c104,902.7) 108.3,898.41 109.42,899.53 cw(c116.42,892.53) 116.42,902.42 414.94,902.42 cw(c414.94,859.85) 445,890 cw(c414.94,859.85) 445.04,889.96 ccw(c488.76,933.67) 488.76,871.85 572.37,871.85 ccw(c572.37,911.49) 600.4,883.46 600.49,883.55 ; 600.53,883.59 ccw(c579.96,904.09) 609,904.09 609,1015.88 cw(c648.63,1015.88) 620.61,1043.9 633.43,1056.73 ccw(c578.4,1111.65) 656.15,1111.65 656.15,1468.04 ccw(c560.19,1468.04) 628.08,1535.86 ccw(c560.19,1468.04) 628.04,1535.9 619.18,1544.76 cw(c653.41,1578.99) 619.14,1544.8 cw(c653.41,1578.99) 605,1578.99 605,1602.11 cw(c698.89,1602.11) 632.5,1668.5 646.68,1682.68 ccw(c573.1,1756.26) 677.16,1756.26 677.16,1942.92 cw(c777.16,1942.92) 706.45,2013.63 860.91,2168.09 cw(c902.76,2126.24) 902.76,2185.43 915.21,2185.43 cw(c915.21,2157.85) 934.7,2177.36 937.53,2174.53 ; 937.55,2174.51 ccw(c955.71,2192.71) 955.71,2167 992.45,2167 ccw(c992.45,2200.43) 1016.09,2176.79 1016.15,2176.85 cw(c1029.23,2163.77) 1029.23,2182.27 1096.95,2182.27 ccw(c1096.95,2228.92) 1129.93,2195.93 1189.23,2255.23 cw(c1193.24,2251.22) 1193.24,2256.89 ccw(c1193.24,2262.57) 1197.25,2258.55 U13.15@1204.47,2265.76
SSRX3_N: C52.1 U13.29 | length 1976.2
  Top Layer w5.15: v1(104,1480.37) cw(c104,1474.3) 108.3,1478.59 109.42,1477.47 ccw(c116.42,1484.47) 116.42,1474.58 123.87,1474.58 ccw(c123.87,1479.73) 127.5,1476.07 ; 127.51,1476.08 ccw(c123.87,1479.73) 129.02,1479.73 129.02,1480.66 cw(c136.43,1480.66) 131.18,1485.89 C52.1@136.28,1491
  Bottom Layer w5.15: v1(104,1480.37) cw(c104,1474.3) 108.3,1478.59 109.42,1477.47 ccw(c116.42,1484.47) 116.42,1474.58 142.74,1474.58 ccw(c142.74,1532.26) 183.5,1491.44 ; 183.53,1491.47 ccw(c146.18,1528.82) 199,1528.82 199,1750.13 cw(c275.8,1750.13) 199,1750.25 cw(c275.8,1750.13) 221.44,1804.38 cw(c275.8,1750.13) 221.49,1804.43 221.55,1804.49 cw(c292.79,1733.26) 221.61,1804.55 cw(c292.79,1733.26) 292.79,1834 370.64,1834 ccw(c370.64,1934) 441.35,1863.29 442.21,1864.15 ccw(c371.5,1934.86) 471.5,1934.86 471.5,1997.36 cw(c580.57,1997.36) 471.5,1997.51 cw(c580.57,1997.36) 503.35,2074.38 cw(c580.57,1997.36) 503.44,2074.48 714.71,2285.75 ccw(c644,2356.46) 744,2356.46 744,2438.08 cw(c825.75,2438.08) 767.94,2495.88 773.21,2501.15 cw(c819.08,2455.28) 819.08,2520.15 951.12,2520.15 ccw(c951.12,2558.99) 978.58,2531.52 cw(c999.41,2510.7) 978.62,2531.56 cw(c999.41,2510.7) 999.41,2540.15 1160.24,2540.15 cw(c1160.24,2508.82) 1182.4,2530.97 1244.97,2468.4 ccw(c1248.93,2472.35) 1248.93,2466.76 cw(c1248.93,2461.17) U13.29@1252.86,2465.14 ; U13.29@1252.88,2465.12 U13.29@1260.11,2457.89
SSRX3_P: C54.1 U13.28 | length 1976.9
  Top Layer w5.15: v1(104,1459.63) ccw(c104,1465.7) 108.3,1461.41 109.42,1462.53 cw(c116.42,1455.53) 116.42,1465.42 123.87,1465.42 cw(c123.87,1460.27) 127.5,1463.93 ; 127.51,1463.92 cw(c123.87,1460.27) 129.02,1460.27 129.02,1459.34 ccw(c136.43,1459.34) 131.18,1454.11 C54.1@136.28,1449
  Bottom Layer w5.15: v1(104,1459.63) ccw(c104,1465.7) 108.3,1461.41 109.42,1462.53 cw(c116.42,1455.53) 116.42,1465.42 142.87,1465.42 ccw(c142.87,1531.95) 189.91,1484.91 190.08,1485.08 ccw(c146.45,1528.71) 208.15,1528.71 208.15,1569 208.15,1584 218.15,1594 218.15,1609 208.15,1619 208.15,1634 208.15,1750.08 cw(c275.92,1750.08) 227.97,1797.97 ; 228,1798 cw(c292.82,1733.18) 228.04,1798.04 cw(c292.82,1733.18) 292.82,1824.85 370.68,1824.85 ccw(c370.68,1933.9) 447.79,1856.79 448.76,1857.76 ccw(c371.58,1934.83) 480.65,1934.83 480.65,1997.33 cw(c580.65,1997.33) 509.94,2068.04 721.21,2279.3 ccw(c644.08,2356.42) 721.26,2279.36 ccw(c644.08,2356.42) 753.15,2356.42 753.15,2437.96 cw(c826.04,2437.96) 774.5,2489.5 777,2492 cw(c822.87,2446.13) 822.87,2511 951.22,2511 ccw(c951.22,2558.76) 984.99,2524.99 cw(c999.49,2510.51) 999.49,2531 1160.21,2531 cw(c1160.21,2508.76) 1175.94,2524.48 1238.5,2461.93 ; 1238.53,2461.9 cw(c1234.55,2457.97) U13.28@1240.14,2458.01 ; U13.28@1240.14,2457.97 ccw(c1245.73,2457.97) 1241.78,2454.02 U13.28@1249.01,2446.78
SSRX4_N: C51.1 U13.35 | length 1616.4
  Top Layer w5.15: v1(104,2057.37) cw(c104,2051.3) 108.3,2055.59 109.42,2054.47 ccw(c116.42,2061.47) 116.42,2051.57 121.87,2051.57 ccw(c121.87,2056.73) 125.5,2053.07 ; 125.51,2053.08 ccw(c121.87,2056.73) 127.02,2056.73 127.02,2057.66 cw(c134.43,2057.66) 129.18,2062.89 C51.1@134.28,2068
  Bottom Layer w5.15: v1@102,2057.37 v1(104,2057.37) cw(c104,2051.3) 108.3,2055.59 109.42,2054.47 ccw(c116.42,2061.47) 116.42,2051.57 288.15,2051.57 ccw(c288.15,2151.57) 358.86,2080.86 482.5,2204.5 cw(c508.21,2178.79) 508.21,2215.15 514.21,2215.15 ccw(c514.21,2241.71) 532.98,2222.92 ; 532.99,2222.93 631.71,2321.65 ccw(c561,2392.36) 661,2392.36 661,2479.76 cw(c770.07,2479.76) 661,2479.91 cw(c770.07,2479.76) 692.85,2556.79 cw(c770.07,2479.76) 692.94,2556.88 719.27,2583.21 cw(c796.39,2506.08) 719.32,2583.26 cw(c796.39,2506.08) 796.39,2615.15 1197,2615.15 cw(c1197,2531.16) 1256.39,2590.55 1311.7,2535.24 ccw(c1315.71,2539.26) 1315.71,2533.58 cw(c1315.71,2527.9) U13.35@1319.72,2531.93 ; U13.35@1319.73,2531.92 U13.35@1326.94,2524.71
SSRX4_P: C53.1 U13.34 | length 1617
  Top Layer w5.15: v1(104,2036.63) ccw(c104,2042.7) 108.3,2038.41 109.42,2039.53 cw(c116.42,2032.53) 116.42,2042.42 121.87,2042.42 cw(c121.87,2037.27) 125.5,2040.93 ; 125.51,2040.92 cw(c121.87,2037.27) 127.02,2037.27 127.02,2036.34 ccw(c134.43,2036.34) 129.18,2031.11 C53.1@134.28,2026
  Bottom Layer w5.15: v1@102,2036.63 v1(104,2036.63) ccw(c104,2042.7) 108.3,2038.41 109.42,2039.53 cw(c116.42,2032.53) 116.42,2042.42 130,2042.42 145,2042.42 155,2032.42 170,2032.42 180,2042.42 214,2042.42 288.2,2042.42 ccw(c288.2,2151.47) 365.3,2074.36 486.29,2195.35 cw(c512,2169.64) 512,2206 514.3,2206 ccw(c514.3,2241.48) 539.39,2216.39 638.21,2315.21 ccw(c561.08,2392.33) 638.26,2315.26 ccw(c561.08,2392.33) 670.15,2392.33 670.15,2479.73 cw(c770.15,2479.73) 699.44,2550.44 725.71,2576.71 cw(c796.42,2506) 796.42,2606 1196.6,2606 cw(c1196.6,2530.2) 1250.19,2583.82 1305.23,2528.77 cw(c1301.22,2524.76) 1306.89,2524.76 ccw(c1312.57,2524.76) 1308.55,2520.75 U13.34@1315.76,2513.53
SSRX_N: U12.17 U13.53 | length 730.4
  Top Layer w5.15: U12.17@873.93,2423.63 881.44,2423.63 ccw(c881.44,2429.26) 885.42,2425.28 cw(c889.41,2421.3) 889.41,2426.93 973.36,2426.93 cw(c973.36,2368.36) 1014.78,2409.78 1039.46,2385.1 ccw(c1093.83,2439.47) 1093.83,2362.57 1507.02,2362.57 ccw(c1507.02,2392.07) 1527.88,2371.21 1527.93,2371.27 cw(c1537.64,2361.56) 1537.64,2375.29 ccw(c1537.64,2381.36) v1(1541.93,2377.07)
  Bottom Layer w5.15: v1(1541.93,2377.07) 1543.71,2378.85 1543.71,2387.05 1550.03,2393.36 1554.66,2393.36 U13.53@1563.53,2402.24
SSRX_P: U12.18 U13.52 | length 731.5
  Top Layer w5.15: U12.18@873.93,2439.38 881.44,2439.38 cw(c881.44,2433.75) 885.42,2437.73 ccw(c889.41,2441.71) 889.41,2436.08 977.15,2436.08 cw(c977.15,2377.51) 1018.57,2418.93 1043.25,2394.25 ccw(c1097.62,2448.62) 1094.08,2371.81 ccw(c1097.62,2448.62) 1097.62,2371.72 1123,2371.72 1138,2371.72 1148,2381.72 1163,2381.72 1173,2371.72 1232,2371.72 1506.95,2371.72 ccw(c1506.95,2392.25) 1521.46,2377.74 ccw(c1511.76,2387.44) 1525.48,2387.44 cw(c1531.56,2387.44) v1(1527.26,2391.74)
  Bottom Layer w5.15: v1(1527.26,2391.74) 1529.04,2393.52 1537.24,2393.52 1543.56,2399.83 1543.56,2404.46 U13.52@1552.43,2413.34
SSTX1_N: C133.1 U6.22 | length 2580.4
  Top Layer w5.15: U6.22@257.89,289.88 268.47,289.88 271.77,286.58 281.68,286.58 287.48,292.38 v1(290,292.38)
  Bottom Layer w5.15: v1(290,292.38) cw(c290,286.31) 294.3,290.6 295.42,289.48 ccw(c302.42,296.48) 302.42,286.58 369.08,286.58 cw(c369.08,254.06) 392.07,277.07 ; 392.08,277.06 ccw(c414.38,299.38) 414.38,267.83 730.47,267.83 ccw(c730.47,367.83) 801.18,297.12 814.53,310.47 ccw(c748.21,376.79) 814.57,310.51 ccw(c748.21,376.79) 842,376.79 842,1928.03 cw(c945.75,1928.03) 872.39,2001.4 875.18,2004.18 cw(c930.26,1949.1) 930.26,2027 1087.26,2027 ccw(c1087.26,2057.76) 1108.99,2035.99 ; 1109.03,2036.03 cw(c1125.92,2019.1) 1125.92,2043.02 1131.87,2043.02 ccw(c1131.87,2048.17) 1135.5,2044.52 ccw(c1131.87,2048.17) 1137.02,2048.17 1137.02,2049.52 cw(c1145.45,2049.52) 1139.49,2055.49 C133.1@1144,2060
SSTX1_P: C132.1 U6.23 | length 2580
  Top Layer w5.15: U6.23@257.89,274.13 268.47,274.13 271.77,277.43 281.68,277.43 287.48,271.63 v1(290,271.63)
  Bottom Layer w5.15: v1(290,271.63) ccw(c290,277.71) 294.3,273.41 295.42,274.53 cw(c302.42,267.53) 302.42,277.43 368.94,277.43 cw(c368.94,253.71) 385.64,270.55 cw(c368.94,253.71) 385.71,270.48 ccw(c414.31,299.22) 414.22,258.68 ccw(c414.31,299.22) 414.31,258.68 730.51,258.68 ccw(c730.51,367.73) 807.62,290.62 821.02,304.02 ccw(c748.3,376.75) 821.09,304.09 ccw(c748.3,376.75) 851.15,376.75 851.15,1927.88 cw(c946.12,1927.88) 878.95,1995.02 ; 878.98,1995.04 cw(c934.05,1939.95) 934.05,2017.85 1087.33,2017.85 ccw(c1087.33,2057.58) 1115.4,2029.46 ; 1115.44,2029.5 cw(c1126,2018.91) 1126,2033.87 1131.87,2033.87 cw(c1131.87,2028.72) 1135.5,2032.37 cw(c1131.87,2028.72) 1137.02,2028.72 1137.02,2027.56 ccw(c1144.96,2027.56) 1139.34,2021.94 C132.1@1144.28,2017
SSTX2_N: C137.1 U5.22 | length 1985.8
  Top Layer w5.15: U5.22@254.43,848.88 265.01,848.88 268.31,845.58 279.68,845.58 285.48,851.38 v1(288,851.38)
  Bottom Layer w5.15: v1(288,851.38) cw(c288,845.31) 292.3,849.6 293.42,848.48 ccw(c300.42,855.48) 300.42,845.58 365.95,845.58 cw(c365.95,813.95) 388.3,836.34 ; 388.32,836.32 ccw(c405.62,853.62) 405.62,829.15 515.92,829.15 cw(c515.92,787.93) 545.05,817.1 ; 545.09,817.06 ccw(c559.38,831.38) 559.38,811.15 632.61,811.15 ccw(c632.61,870.39) 674.49,828.49 ccw(c627.42,875.58) 694,875.58 694,1460.15 cw(c729.85,1460.15) 704.47,1485.47 ; 704.5,1485.5 ccw(c686.39,1503.61) 712,1503.61 712,1939.84 cw(c821.07,1939.84) 712,1939.98 cw(c821.07,1939.84) 743.85,2016.86 cw(c821.07,1939.84) 743.94,2016.96 836.06,2109.07 cw(c913.18,2031.95) 836.12,2109.13 cw(c913.18,2031.95) 913.18,2141.02 1014.15,2141.02 ccw(c1014.15,2146.17) 1017.79,2142.52 ; 1017.79,2142.53 ccw(c1014.15,2146.17) 1019.3,2146.17 1019.3,2147.52 cw(c1027.73,2147.52) 1021.45,2153.15 cw(c1027.73,2147.52) 1021.76,2153.48 C137.1@1026.28,2158
SSTX2_P: C136.1 U5.23 | length 1985.8
  Top Layer w5.15: U5.23@254.43,833.13 265.01,833.13 268.31,836.43 279.68,836.43 285.48,830.63 v1(288,830.63)
  Bottom Layer w5.15: v1(288,830.63) ccw(c288,836.71) 292.3,832.41 293.42,833.53 cw(c300.42,826.53) 300.42,836.43 365.89,836.43 cw(c365.89,813.8) 381.88,829.81 ccw(c405.57,853.5) 405.57,820 515.86,820 cw(c515.86,787.76) 538.63,810.58 ; 538.65,810.56 ccw(c559.31,831.22) 538.71,810.5 ccw(c559.31,831.22) 559.24,802 ccw(c559.31,831.22) 559.31,802 632.74,802 ccw(c632.74,870.09) 680.88,821.94 681.05,822.11 ccw(c627.71,875.46) 703.15,875.46 703.15,1460.06 cw(c730.06,1460.06) 711.03,1479.09 ccw(c686.6,1503.52) 721.15,1503.52 721.15,1939.8 cw(c821.15,1939.8) 750.44,2010.51 842.5,2102.58 cw(c913.22,2031.87) 913.22,2131.87 1014.15,2131.87 cw(c1014.15,2126.72) 1017.79,2130.36 cw(c1014.15,2126.72) 1019.3,2126.72 1019.3,2125.56 ccw(c1027.24,2125.56) 1021.61,2119.95 C136.1@1026.57,2115
SSTX3_N: C139.1 U2.22 | length 1628
  Top Layer w5.15: U2.22@251.89,1411.88 262.47,1411.88 265.77,1408.58 275.68,1408.58 281.48,1414.38 v1(284,1414.38)
  Bottom Layer w5.15: v1(284,1414.38) cw(c284,1408.31) 288.3,1412.6 289.42,1411.48 ccw(c296.42,1418.48) 296.42,1408.58 352.25,1408.58 ccw(c352.25,1430.75) 367.91,1415.06 ; 367.93,1415.08 ccw(c353.26,1429.74) 374,1429.74 374,1469.72 ccw(c354.72,1469.72) 368.35,1483.35 ccw(c352.31,1467.31) 352.31,1490 292.74,1490 cw(c292.74,1537.65) 259.08,1503.92 cw(c292.74,1537.65) 259.04,1503.96 258.95,1504.05 cw(c285.76,1530.85) 247.85,1530.85 247.85,1660.35 cw(c330.6,1660.35) 247.85,1660.48 cw(c330.6,1660.35) 272.04,1718.82 cw(c330.6,1660.35) 272.09,1718.86 274.79,1721.57 cw(c326.9,1669.46) 326.9,1743.15 407.79,1743.15 ccw(c407.79,1843.15) 478.5,1772.44 512.71,1806.65 ccw(c442,1877.36) 542,1877.36 542,1968.76 cw(c651.07,1968.76) 542,1968.91 cw(c651.07,1968.76) 573.85,2045.79 cw(c651.07,1968.76) 573.94,2045.88 756.71,2228.65 ccw(c686,2299.36) 785.99,2297.99 ccw(c686,2299.36) 786,2299.36 786,2402.73 cw(c837.19,2402.73) 786,2402.84 cw(c837.19,2402.73) 800.95,2438.89 cw(c837.19,2402.73) 800.99,2438.93 821.8,2459.74 cw(c847.96,2433.58) 821.86,2459.8 cw(c847.96,2433.58) 847.96,2470.57 855.87,2470.57 ccw(c855.87,2475.73) 859.5,2472.07 ; 859.51,2472.08 ccw(c855.87,2475.73) 861.02,2475.73 861.02,2476.66 cw(c868.43,2476.66) 863.18,2481.89 C139.1@868.28,2487
SSTX3_P: C138.1 U2.23 | length 1627.7
  Top Layer w5.15: U2.23@251.89,1396.13 262.47,1396.13 265.77,1399.43 275.68,1399.43 281.48,1393.63 v1(284,1393.63)
  Bottom Layer w5.15: 265.47,1510.47 ccw(c292.8,1537.8) 292.8,1499.15 352.41,1499.15 cw(c352.41,1467.56) 374.75,1489.9 374.86,1489.79 cw(c354.83,1469.77) 383.15,1469.77 383.15,1429.66 cw(c353.46,1429.66) 374.45,1408.66 374.33,1408.54 cw(c352.34,1430.54) 352.34,1399.43 296.42,1399.43 ccw(c296.42,1389.53) 289.42,1396.54 288.3,1395.41 cw(c284,1399.71) v1(284,1393.63) ; 265.45,1510.49 cw(c285.92,1530.92) 257,1530.92 257,1660.31 cw(c330.69,1660.31) 278.56,1712.39 ; 278.58,1712.42 cw(c330.69,1660.31) 330.69,1734 407.83,1734 ccw(c407.83,1843.05) 484.94,1765.94 519.21,1800.21 ccw(c442.08,1877.33) 519.26,1800.26 ccw(c442.08,1877.33) 551.15,1877.33 551.15,1968.73 cw(c651.15,1968.73) 580.44,2039.44 763.21,2222.21 ccw(c686.08,2299.33) 795.13,2297.43 ccw(c686.08,2299.33) 795.15,2299.33 795.15,2402.68 cw(c837.32,2402.68) 807.47,2432.47 ; 807.5,2432.5 828.24,2453.24 cw(c848,2433.48) 848,2461.43 855.87,2461.43 cw(c855.87,2456.27) 859.5,2459.93 ; 859.51,2459.92 cw(c855.87,2456.27) 861.02,2456.27 861.02,2455.34 ccw(c868.43,2455.34) 863.18,2450.11 C138.1@868.28,2445
SSTX4_N: C141.1 U1.22 | length 961.9
  Top Layer w5.15: U1.22@249.89,1988.88 260.47,1988.88 263.77,1985.58 273.68,1985.58 279.48,1991.38 v1(282,1991.38)
  Bottom Layer w5.15: v1(282,1991.38) cw(c282,1985.31) 286.3,1989.6 287.42,1988.48 ccw(c294.42,1995.48) 294.42,1985.58 312.21,1985.58 ccw(c312.21,2082.54) 380.73,2013.94 ccw(c312.21,2082.54) 380.77,2013.98 428.85,2062.06 671.71,2304.92 ccw(c601,2375.63) 701,2375.63 701,2472.86 cw(c792.94,2472.86) 727.93,2537.87 730.71,2540.65 cw(c788.47,2482.89) 788.47,2564.58 856.87,2564.57 ccw(c856.87,2569.73) 860.5,2566.07 ; 860.51,2566.08 ccw(c856.87,2569.73) 862.02,2569.73 862.02,2570.66 cw(c869.43,2570.66) 864.18,2575.89 C141.1@869.28,2581
SSTX4_P: C140.1 U1.23 | length 961.9
  Top Layer w5.15: U1.23@249.89,1973.13 260.47,1973.13 263.77,1976.43 273.68,1976.43 279.48,1970.63 v1(282,1970.63)
  Bottom Layer w5.15: v1(282,1970.63) ccw(c282,1976.71) 286.3,1972.41 287.42,1973.53 cw(c294.42,1966.53) 294.42,1976.43 316,1976.43 ccw(c316,2073.39) 384.56,2004.83 438,2058.27 678.21,2298.48 ccw(c601.08,2375.6) 678.26,2298.54 ccw(c601.08,2375.6) 710.15,2375.6 710.15,2472.71 cw(c793.29,2472.71) 734.5,2531.5 cw(c792.26,2473.74) 792.26,2555.43 856.87,2555.43 cw(c856.87,2550.27) 860.5,2553.93 ; 860.51,2553.92 cw(c856.87,2550.27) 862.02,2550.27 862.02,2549.34 ccw(c869.43,2549.34) 864.18,2544.11 C140.1@869.28,2539
SSTX_N: C135.1 U12.21 | length 74
  Top Layer w5.15: U12.21@873.93,2486.63 881.44,2486.63 cw(c881.44,2481) 885.42,2484.98 ccw(c889.41,2488.96) 887.76,2483.57 ccw(c889.41,2488.96) 889.41,2483.33 902.64,2483.33 902.88,2483.57 924.87,2483.57 ccw(c924.87,2488.73) 928.5,2485.07 ; 928.51,2485.08 ccw(c924.87,2488.73) 930.02,2488.73 930.02,2489.66 cw(c937.43,2489.66) 932.18,2494.89 C135.1@937.28,2500
SSTX_P: C134.1 U12.20 | length 74
  Top Layer w5.15: U12.20@873.93,2470.88 881.44,2470.88 ccw(c881.44,2476.51) 885.42,2472.53 cw(c889.41,2468.55) 889.41,2474.18 906.43,2474.18 906.67,2474.43 924.87,2474.43 cw(c924.87,2469.27) 928.5,2472.93 ; 928.51,2472.92 cw(c924.87,2469.27) 930.02,2469.27 930.02,2468.34 ccw(c937.43,2468.34) 932.18,2463.11 C134.1@937.28,2458
TX1_N: C3.2 U6.33 | length 754.2
  Top Layer w4.29: U6.33@415.37,226.89 415.37,218.01 ccw(c420.03,218.01) 416.73,214.71 cw(c413.44,211.42) 418.1,211.42 418.1,104.85 ccw(c436.46,104.85) 423.45,91.89 ; 423.48,91.86 430.41,84.93 ccw(c459.91,114.42) 430.49,84.85 ccw(c459.91,114.42) 459.81,72.71 ccw(c459.91,114.42) 459.91,72.71 481.45,72.71 ccw(c481.45,166.42) 547.71,100.16 551.97,104.42 cw(c622.68,33.71) 622.68,133.71 830,133.71 cw(c830,101.62) 852.69,124.31 ccw(c875.38,147) 875.38,114.91 991.3,114.91 cw(c991.3,110.62) 994.33,113.66 cw(c991.3,110.62) 995.59,110.62 995.59,109.41 ccw(c1002.81,109.41) 997.45,104.56 ccw(c1002.81,109.41) 997.7,104.3 C3.2@1003,99